# Altium PCB PowerFK02.PcbDoc
Units mil, origin at the board's own origin, x right, y up, seen from the top; angles counter-clockwise.
Board outline 6000 x 4000 mil, 2 copper layers (Top Layer, Bottom Layer); 31 components, 21 nets, 90 pads, 0 vias.
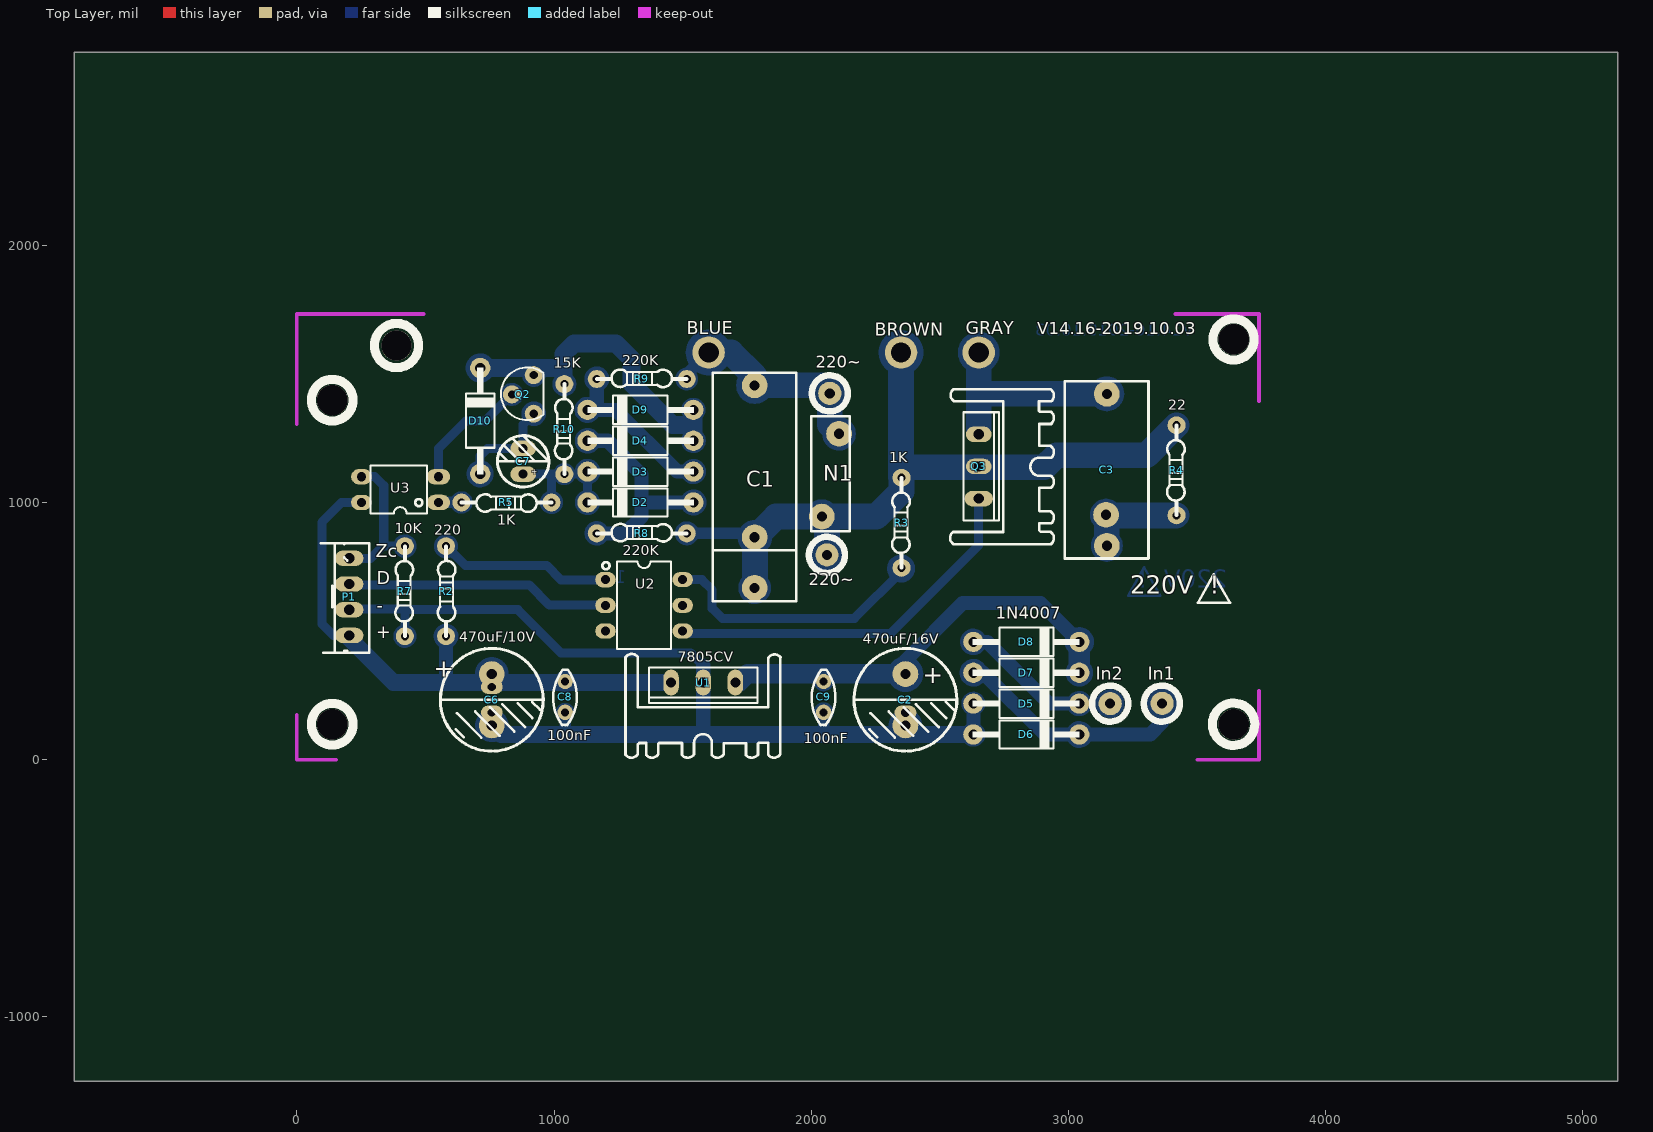
[diagram p0: Top Layer view]
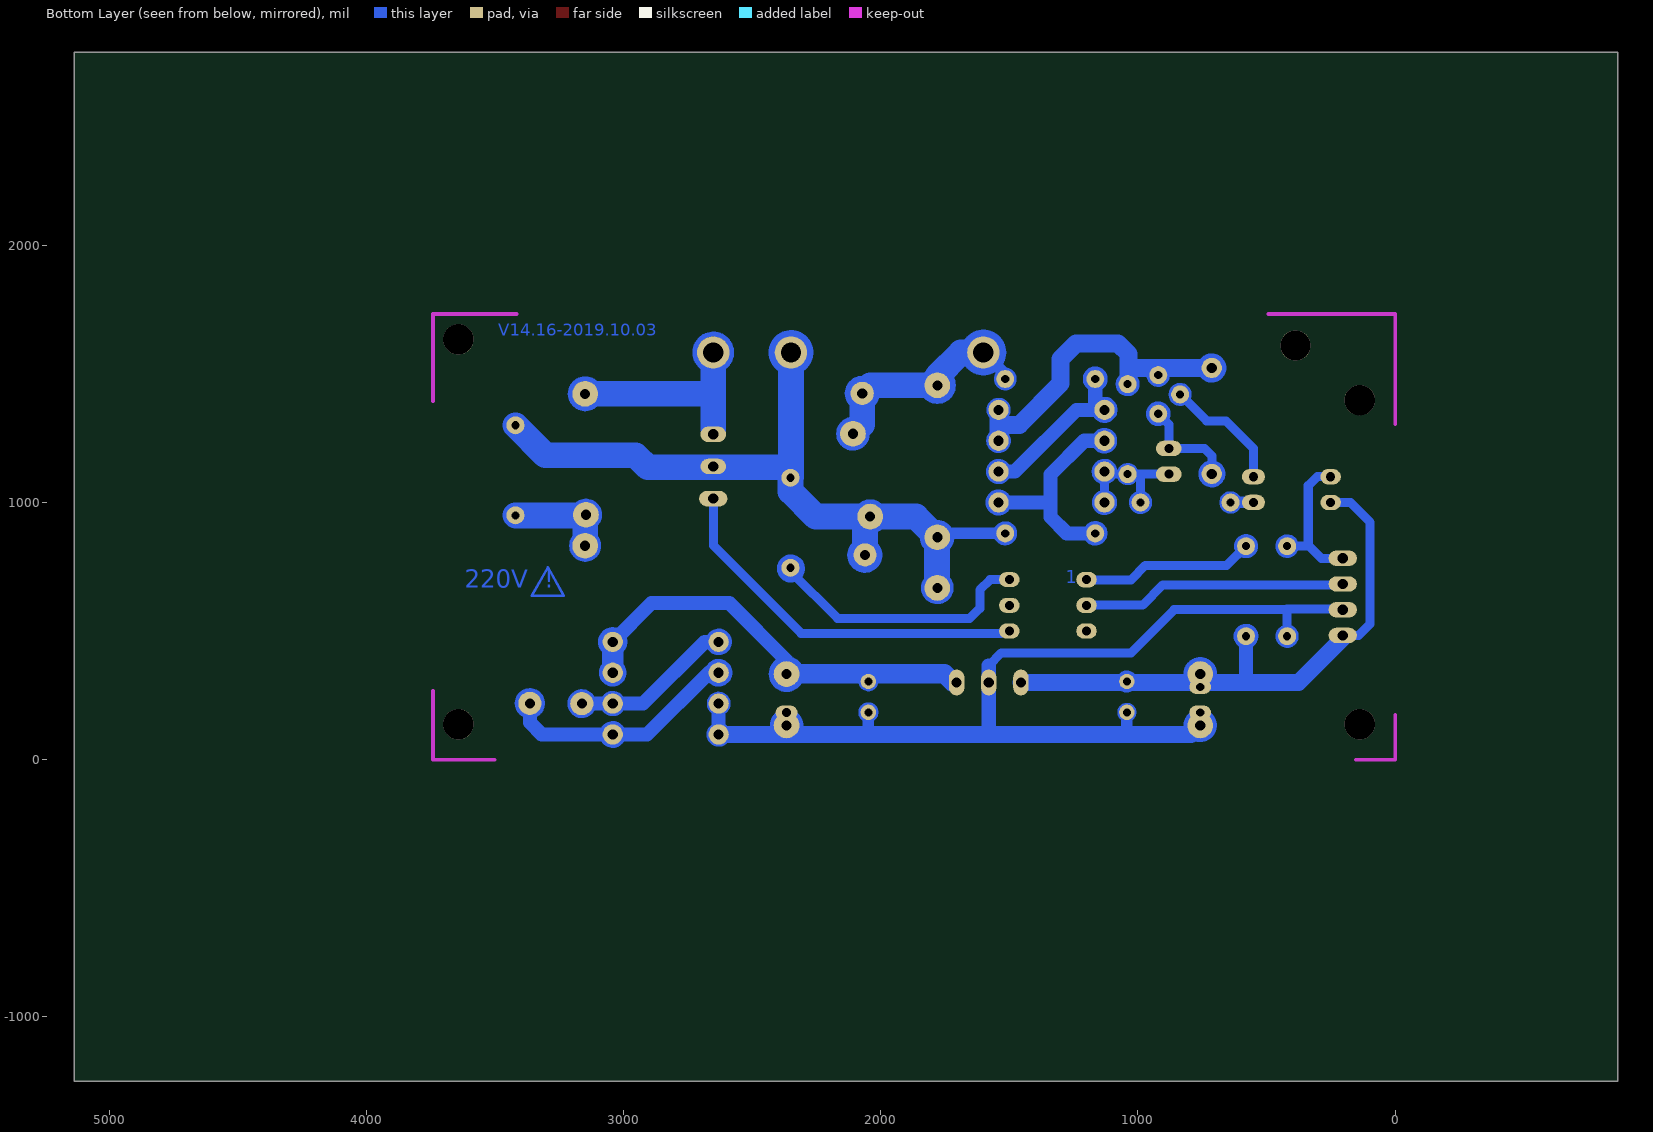
[diagram p1: Bottom Layer view, seen from below]

## Layer stack, top to bottom
Top Solder: solder mask 0.4, Solder Resist, Dk 3.5
Top Layer: signal copper 1.4
Dielectric1: dielectric 12.6, FR-4, Dk 4.8
Bottom Layer: signal copper 1.4
Bottom Solder: solder mask 0.4, Solder Resist, Dk 3.5

## Board outline
-865,-1250 5135,-1250 5135,2750 -865,2750

## Design rules (kind name [scope] priority, off if disabled: settings)
Clearance [All] p1: gap=10
FabricationTestPointUsage TestPointUsage [All] p1: valid=0 allowmultiple=FALSE
FabricationTestpoint Testpoint [All] p1: side=3 testpointundercomponent=TRUE minsize=40 maxsize=100 preferedsize=60 minholesize=0 maxholesize=40 preferedholesize=32 testpointgrid=1 allowsidetop=TRUE allowsidebottom=TRUE usegrid=TRUE gridtolerance=0.01
PolygonConnect [All] p1: connectstyle=Relief reliefconductorwidth=10 reliefentries=4 polygonreliefangle="90 Angle" airgapwidth=10
RoutingVias [All] p1: holewidth=28 width=50 viastyle="Through Hole" minholewidth=28 minwidth=50 maxholewidth=28 maxwidth=50
SolderMaskExpansion [All] p1: expansion=4
Width [All] p1: maxlimit=200 minlimit=10 preferedwidth=35 toplayer_maxwidth=10 toplayer_prefwidth=10 minimp=50.000000 maximp=50.000000 favimp=50.000000
27 further rules are at their usual default settings.

## Components (designator, comment, footprint, x,y, rotation, side; value= is the part's Value field where it differs from the comment)
C1 "220nF/300V" Cap15-20 1780,1160 r270 top
C2 "470uF/16V" RB.2/.4 2366,333 r270 top
C3 "Comment" Cap15 3149,1127 r270 top
C6 "470uF/10V" RB.2/.4 758,333 r270 top (schematic designator C2)
C7 "10uF/50V" RB.1/.2 880,1160 r90 top
C8 "100nF" RAD0.12 1043,184 r90 top (schematic designator C3)
C9 "100nF" RAD0.12 2048,184.02 r90 top (schematic designator C3)
D2 "1N4007" DIODE0.4 1336,1000 r180 top
D3 "1N4007" DIODE0.4 1336,1120 r180 top
D4 "1N4007" DIODE0.4 1336,1240 r180 top
D5 "1N4007" DIODE0.4 2836,218 r0 top (schematic designator D1)
D6 "1N4007" DIODE0.4 2836,98 r0 top (schematic designator D2)
D7 "1N4007" DIODE0.4 2836,338 r0 top (schematic designator D3)
D8 "1N4007" DIODE0.4 2836,458 r0 top (schematic designator D4)
D9 "1N4007" DIODE0.4 1336,1360 r180 top
D10 "1N4007" DIODE0.4 713,1317 r90 top
N1 "10D471K" VARISTOR-10MIL 2041,945 r90 top
P1 "Header 4" CON4 204,483 r0 top
Q2 "C945" TO92BS2 896,1420 r270 top
Q3 "Triac" TO-220HS28#1 2651,1140 r270 top
R2 "220" RES0.35 580,480 r90 top
R3 "1K" RES0.35 2351,1096 r270 top
R4 "22" RES0.35 3420,1300 r270 top
R5 "1K" RES0.35 640,1000 r0 top
R7 "10K" RES0.35 420,830 r270 top
R8 "220K" RES0.35 1516,880 r180 top
R9 "220K" RES0.35 1516,1480 r180 top
R10 "15K" RES0.35 1040,1460 r270 top
U1 "7805CV" TO-220HS28#2 1580,300 r180 top (schematic designator Q2)
U2 "MOC3021" DIP6 1200,700 r270 top
U3 "PC817" DIP4-OPTO 551.18,1000 r90 top

## Footprints (in the part's own frame and the unit in brackets; to place one, negate y for a bottom-side part, rotate by r counter-clockwise, add the part's x,y. Pads: shape width x height; smd on the part's side, far side on the other; paste and mask are expansions set on the pad)
Cap15 [mm]
  round 2.54 hole 1: 1(-7.5,0) 2(7.5,0)
  silkscreen extent -8.76,-4.14 8.76,4.11
Cap15-20 [mm]
  round 2.54 hole 1: 1(7.5,0) 1(12.5,0) 2(-7.5,0)
  silkscreen extent -8.76,-4.14 13.82,4.11
CON4 [mil] "100mil between pins"
  oval 110x60 hole 39.37: 1(0,0) 2(0,100) 3(0,200) 4(0,300)
  silkscreen extent -110,-67 77,358
DIODE0.4 [mm] "Diode, Axial; Body 5.2 x 2.7 mm (LxDia. max), Lead Dia. 0.86 mm (max)"
  round 2 hole 1: 1(-5.23,0) 2(5.23,0)
  silkscreen extent -5.3,-1.4 5.25,1.4
DIP4-OPTO [mil] "DIP; 4 Leads; Row Spacing 7.62 mm; Pitch 2.54 mm"
  oval 60x90 hole 35.43: 1(0,0) 2(100,0)
  oval 59.05x80 hole 35.43: 3(100,300) 4(0,300)
  silkscreen extent -43,46 143,265
DIP6 [mm] "DIP; 6 Leads; Row Spacing 7.62 mm; Pitch 2.54 mm"
  oval 1.524x2.032 hole 0.9: 1(0,0) 2(2.54,0)
  oval 1.5x2.032 hole 0.9: 3(5.08,0) 4(5.08,7.62) 5(2.54,7.62) 6(0,7.62)
  silkscreen extent -1.78,-0.3 6.86,6.46
RAD0.12 [mil]
  round 60 hole 31.5: 1(0,0) 2(120,0)
  silkscreen extent -49,-45 166,46
RB.1/.2 [mil]
  oval 60x100 hole 35.43: 1(-50,0) 2(50,0)
  silkscreen extent -100,-100 100,100
RB.2/.4 [mm]
  round 2.54 hole 1: 1(0,0) 2(5.08,0)
  silkscreen extent -2.54,-5.08 7.62,5.08
RES0.35 [mil] "Diode, Axial; Body 5.2 x 2.7 mm (LxDia. max), Lead Dia. 0.86 mm (max)"
  round 70 hole 31.5: 1(0,0)
  round 70 hole 31.5 paste+0: 2(350,0)
  silkscreen extent 0,-37 350,32
TO92BS2 [mil] "NPN-CC5551,C945 Base Side"
  round 70 hole 31.5: 1(-75,25) 2(0,-60) 3(75,25)
  silkscreen extent -105,-102 100,63
TO-220HS28#1 [mil] "MOSFET-IRF4905- Z46n"
  oval 60x100 hole 39.37: 1(-125,0) 2(0,0)
  oval 60x110 hole 39.37: 3(125,0)
  silkscreen extent -300,-111 302,292
TO-220HS28#2 [mil] "MOSFET-IRF4905- Z46n"
  oval 60x100 hole 39.37: 1(-125,0) 2(0,0) 3(125,0)
  silkscreen extent -300,-111 302,292
VARISTOR-10MIL [mil]
  round 100 hole 39.37: 1(0,0) 2(322,-67)
  silkscreen extent -56,-109 390,41

## Part data
C1: library part CAP, "Capacitor"
C2 C6: library part "Cap Pol1", "Polarized Capacitor (SMD)"
C7: library part "Cap Pol", "Polarized Capacitor"
C8 C9: library part Cap, "Capacitor np"
D2 D3 D4 D9 D10: library part Diode
D5 D6 D7 D8: library part Diode, "1 Amp General Purpose Rectifier"
N1: library part "Res Varistor", "Varistor (Voltage-Sensitive Resistor)"
P1: "Header, 4-Pin"
Q2 U1: library part BC337, "NPN General Purpose Amplifier"
Q3: "Silicon Bidirectional Triode Thyristor"
R2 R3 R4 R5 R7 R8 R9 R10: library part Resistor, "Resistor"
U2: library part "Opto TRIAC_1", "Opto-Triac"
U3: library part Optoisolator1, "4-Pin Phototransistor Optocoupler"

## Free pads (board coordinates)
  oval 85x55 hole 35.43: 0(2366,183)
  round 100 hole 39.37: 0(3146,952)
  oval 85x55 hole 31.5: 1(758,183) 1(758,283)
  round 118.11 hole 118.11: 6(3641.73,1633.86) 7(137.8,137.8) 7(137.8,1397.64) 7(387.8,1610) 8(3641.73,137.8)
  round 125.98 hole 78.74: 13(1601,1583) 13(2349,1583) 13(2651,1583)
  round 90 hole 39.37: 14(2061,796) 14(2072,1424) 14(3162,218) 14(3364,219)

## Nets (pads, with @x,y where several pads share a name; then routed paths per layer and width w, separated by ;. In a path a pad name is that pad's centre, name@x,y a point inside that pad or via, vN(x,y) a via of type N, cw(c..) or ccw(c..) an arc to the next point about the centre after c; other vN are vias at no path point)
220V: C1.1 N1.1 pad.13@2349,1583 pad.14@2061,796 Q3.2 R3.1 R4.1 R8.1 | length 4775.9
  Bottom Layer w30: 2092.97,945 ccw(c2041,945) 2092.97,945 ; 2421.11,1583 ccw(c2349,1583) 2421.11,1583
  Bottom Layer w35: C1.1@1764,900 C1.1@1769,905 ; R8.1@1545.02,880 ccw(c1516,880) R8.1@1545.02,880 ; C1.1@1825.83,667.87 ccw(c1780,667.87) C1.1@1825.83,667.87 ; 1831,865 ccw(c1781,865) 1831,865 ; 2113,795 ccw(c2062,795) 2113,795
  Bottom Layer w45: R8.1 1548.02,880 C1.1@1763,880
  Bottom Layer w100: C1.1@1781,667.87 1781,863 1863,945 N1.1 ; pad.14@2061,796 2061,925 N1.1 ; pad.13@2349,1583 2349,1098 R3.1 2351,1043 2253,945 N1.1 ; 2388,1137 2906,1137 2953,1184 3304,1184 R4.1
+5V: C6.1 C8.2 P1.1 pad.1@758,283 R2.1 U1.3 U3.4 | length 3212.9
  Bottom Layer w25: 615.69,480 ccw(c580,480) 615.69,480 ; 811.34,333 ccw(c758,333) 811.34,333 ; 1073,304 ccw(c1043,304) 1073,304
  Bottom Layer w35: P1.1@204,482 143,482 97,528 97,923 174,1000 U3.4 ; pad.1@774,307 C8.2@1029,307
  Bottom Layer w55: P1.1@204,471 P1.1@204,482 ; 580,310 R2.1
  Bottom Layer w65: P1.1@204,471 375,300 U1.3
+VREL: C2.1 C9.2 D7.2 D8.2 U1.1 | length 2707.4
  Bottom Layer w10: 2081.36,304.02 ccw(c2048,304.02) 2081.36,304.02
  Bottom Layer w25: 2423.08,333 ccw(c2366,333) 2423.08,333
  Bottom Layer w35: C2.1 2366,386 ; D7.2@3077.91,338 ccw(c3041.91,338) D7.2@3077.91,338 ; 3081.55,458 ccw(c3041.91,458) 3081.55,458
  Bottom Layer w55: 2366,386 2589,609 2890.91,609 D8.2
  Bottom Layer w75: U1.1@1718,300 1752,334 C2.1@2364,334
  Bottom Layer w85: D7.2 D8.2
DIMOUT: P1.3 U2.2 | length 1008.7
  Bottom Layer w35: P1.3@224,680 903,680 982,601 U2.2@1200,601
GND: C2.2 C6.2 C8.1 C9.1 D5.1 D6.1 P1.2 pad.0@2366,183 pad.1@758,183 R7.2 U1.2 | length 5419.6
  Bottom Layer w20: 455.13,480 ccw(c420,480) 455.13,480
  Bottom Layer w30: C6.2@793.33,98 cw(c758,133) C6.2@807.73,133 ; C8.1@1065,184 ccw(c1043,184) C8.1@1065,184 ; C9.1@2072.07,184.02 ccw(c2048,184.02) C9.1@2072.07,184.02 ; 2416,133 ccw(c2366,133) 2416,133 ; D5.1@2661.25,218 ccw(c2630.09,218) D5.1@2661.25,218 ; D6.1@2662.35,98 ccw(c2630.09,98) D6.1@2662.35,98
  Bottom Layer w35: P1.2@219,585 420,585 ; R7.2@420,490 420,583 859,583 1027,415 1531,415 1580,366 ; 1577,104 1580,107
  Bottom Layer w45: 1043,121 C8.1 ; C9.1 2048,99 2049,98 ; D6.1@2628,98 D6.1
  Bottom Layer w55: 1580,107 1580,366 ; 2630.09,138 D5.1
  Bottom Layer w65: C6.2 793,98 793.33,98 2049,98 D6.1@2628,98
IN1: D6.2 D7.1 pad.14@3364,219 | length 1663.2
  Bottom Layer w30: D6.2@3078.92,98 ccw(c3041.91,98) D6.2@3078.92,98 ; pad.14@3408.05,219 ccw(c3364,219) pad.14@3408.05,219
  Bottom Layer w35: D7.1@2666.14,338 ccw(c2630.09,338) D7.1@2666.14,338
  Bottom Layer w55: D7.1 2668,338 2908,98 D6.2 3318,98 3364,144 pad.14@3364,219
IN2: D5.2 D8.1 pad.14@3162,218 | length 1316.4
  Bottom Layer w30: D5.2@3075.92,218 ccw(c3041.91,218) D5.2@3075.92,218 ; pad.14@3203,218 ccw(c3162,218) pad.14@3203,218
  Bottom Layer w35: D8.1@2664.11,458 ccw(c2630.09,458) D8.1@2664.11,458
  Bottom Layer w55: D8.1 2684,458 2924,218 D5.2 pad.14@3162,218
MOTOR2: C3.1 pad.13@2651,1583 Q3.1 | length 1597
  Bottom Layer w20: 2722.25,1583 ccw(c2651,1583) 2722.25,1583 ; 3206.94,1422.28 ccw(c3149,1422.28) 3206.94,1422.28
  Bottom Layer w100: Q3.1@2651,1285 2651,1433 pad.13@2651,1583 ; 2653.72,1423 C3.1@3141,1423
NetC4_2: C3.2 pad.0@3146,952 R4.2 | length 986.1
  Bottom Layer w30: pad.0@3193.8,952 ccw(c3146,952) pad.0@3193.8,952 ; C3.2@3196.28,831.72 ccw(c3149,831.72) C3.2@3196.28,831.72
  Bottom Layer w100: C3.2 3149,949 3419,949 R4.2
NetC7_1: C7.1 D2.2 D3.2 R5.2 R10.2 | length 1246.9
  Bottom Layer w30: R5.2@1020.07,1000 ccw(c990,1000) R5.2@1020.07,1000 ; R10.2@1068.02,1110 ccw(c1040,1110) R10.2@1068.02,1110 ; D2.2@1164.22,1000 ccw(c1130.09,1000) D2.2@1164.22,1000
  Bottom Layer w35: C7.1 986,1110 ; R5.2 990,1106 986,1110 ; D2.2 1130.09,1100 1120.09,1110 R10.2 986,1110 ; D3.2@1162.19,1120 ccw(c1130.09,1120) D3.2@1162.19,1120
NetC7_2: C7.2 D10.1 Q2.3 | length 809.7
  Bottom Layer w35: D10.1 713,1181 742,1210 C7.2 880,1304 Q2.3 ; D10.1@748,1111.09 ccw(c713,1111.09) D10.1@748,1111.09 ; Q2.3@951.07,1345 ccw(c921,1345) Q2.3@951.07,1345
NetD2_1: D2.1 D4.2 R8.2 | length 1588.4
  Bottom Layer w35: D4.2@1162.19,1240 ccw(c1130.09,1240) D4.2@1162.19,1240 ; R8.2@1196,880 ccw(c1166,880) R8.2@1196,880 ; D2.1@1568.91,1000 ccw(c1541.91,1000) D2.1@1568.91,1000 ; D2.1@1574.92,1000 ccw(c1541.91,1000) D2.1@1574.92,1000
  Bottom Layer w55: D4.2 1209,1240 1340,1109 1340,943 1277,880 R8.2 ; 1351,1000 D2.1
NetD3_1: D3.1 D9.2 R9.2 | length 1220.7
  Bottom Layer w35: D9.2@1163.2,1360 ccw(c1130.09,1360) D9.2@1163.2,1360 ; R9.2@1197,1480 ccw(c1166,1480) R9.2@1197,1480 ; D3.1@1573.36,1120 ccw(c1541.91,1120) D3.1@1573.36,1120
  Bottom Layer w55: D9.2 1239,1360 1479,1120 D3.1 ; D9.2@1166,1371 R9.2
NetD4_1: D4.1 D9.1 D10.2 Q2.1 R10.1 | length 2265.3
  Bottom Layer w30: D9.1@1573.92,1360 ccw(c1541.91,1360) D9.1@1573.92,1360 ; D4.1@1574.92,1240 ccw(c1541.91,1240) D4.1@1574.92,1240
  Bottom Layer w35: D10.2@752.14,1522.91 ccw(c713,1522.91) D10.2@752.14,1522.91 ; Q2.1@948.92,1495 ccw(c921,1495) Q2.1@948.92,1495 ; R10.1@1069.15,1460 ccw(c1040,1460) R10.1@1069.15,1460
  Bottom Layer w70: D10.2 1030.91,1522.91 1036,1517.81 ; R10.1@1036,1480 1036,1517.81 ; D4.1 1541.91,1302 ; D9.1 1541.91,1302 ; 1036,1517.81 1036,1577 1077,1618 1241,1618 1301,1558 1301,1462 1461,1302 1541.91,1302
NetQ2_2: Q2.2 U3.2 | length 651.6
  Bottom Layer w35: U3.2 551.18,1210.18 658,1317 733,1317 Q2.2 ; Q2.2@863,1420 ccw(c836,1420) Q2.2@863,1420
NetQ3_3: Q3.3 U2.4 | length 1442.7
  Bottom Layer w35: U2.4@1532,491 2309,491 2651,833 Q3.3
NetR2_2: R2.2 U2.1 | length 1038.9
  Bottom Layer w35: R2.2 655,755 971,755 1027,699 U2.1@1200,699 ; R2.2@609.02,830 ccw(c580,830) R2.2@609.02,830 ; R2.2@609.02,830 cw(c580,830) 550.98,830 cw(c580,830) R2.2@609.02,830
NetR3_2: R3.2 U2.6 | length 1264.3
  Bottom Layer w35: U2.6 1575,700 1614.5,660.5 1614.5,588.5 1654,549 2168,549 R3.2@2351,732 ; 2386.05,743 ccw(c2349,743) 2386.05,743
NetR5_1: R5.1 U3.1 | length 252.2
  Bottom Layer w35: R5.1@666,1000 ccw(c640,1000) R5.1@666,1000
  Bottom Layer w45: U3.1 R5.1
NULL: C1.2 N1.2 pad.13@1601,1583 pad.14@2072,1424 R9.1 | length 2524
  Bottom Layer w30: R9.1@1545.15,1480 ccw(c1516,1480) R9.1@1545.15,1480 ; 1674.98,1583 ccw(c1601,1583) 1674.98,1583 ; 1837.04,1455.28 ccw(c1780,1455.28) 1837.04,1455.28 ; 2125.04,1424 ccw(c2072,1424) 2125.04,1424 ; 2158.36,1267 ccw(c2108,1267) 2158.36,1267
  Bottom Layer w45: R9.1 1516,1498 pad.13@1601,1583
  Bottom Layer w100: pad.13@1601,1583 1688,1583 1780,1491 C1.2 2040.72,1455.28 2072,1424 2072,1303 N1.2
ZEROC: P1.4 R7.1 U3.3 | length 729.1
  Bottom Layer w35: P1.4@222,783 287,783 338,834 ; U3.3 303,1100 338,1065 338,834 ; R7.1 342,830 338,834 ; R7.1@448.02,830 ccw(c420,830) R7.1@448.02,830
pads on no net: U2.3 U2.5
copper on no net: | length 378.1
  Bottom Layer w10: 3293.63,748.26 3232.41,637.04 3356.43,637.04 ; 3293.68,747.31 3356.9,637.04

## Keep-outs
Keep-Out Layer:
  lines w15: 0,174 0,0 152,0 ; 0,1304 0,1732.28 493,1732.28 ; 3415,1732.28 3740.16,1732.28 3740.16,1395 ; 3501,0 3740.16,0 3740.16,268

## Other copper
Bottom Layer:
  text "V14.16-2019.10.03" at 3487,1633 h80
  text "1" at 1280,685 h50
  text "220V  !" at 3616.75,645.38 h120

## Silkscreen, mask and mechanical layers (free items; w line width, h text height)
Top Overlay:
  circle w25: c3161.82,218 r70.18
  circle w25: c3362.82,218 r70.18
  circle w35: c3641.73,1633.86 r79.97
  circle w35: c3641.73,137.8 r82.36
  circle w35: c137.8,137.8 r81.07
  circle w35: c137.8,1397.64 r81.03
  circle w35: c387.8,1610 r86.02
  circle w25: c2061,796 r70.18
  circle w25: c2072,1424 r70.18
  lines w10: 3564.47,720.64 3503.25,609.42 3627.26,609.42 ; 3564.52,719.69 3627.74,609.42
  text "BLUE" at 1516,1653 h50
  text "GRAY" at 2601,1653 h50
  text "BROWN" at 2247,1649 h50
  text "V14.16-2019.10.03" at 2878,1638 h80
  text "220~" at 2018,1509 h80
  text "Zc" at 306,787 h50
  text "D" at 311,683 h50
  text "220~" at 1990,663 h80
  text "220V  !" at 3239.94,621.69 h120
  text "-" at 311,575 h50
  text "1N4007" at 2718,533 h80
  text "+" at 308,472 h50
  text "+" at 533,323 h70
  text "In2" at 3106,311 h50
  text "In1" at 3309,311 h50
  text "+" at 2433,298 h70

## Text inside footprints (layer, text, board x,y; h text height)
C7: Top Overlay "+" at 940,1106 h39.37 r90